# EAGLE board picaxe_dev (EAGLE 7.5.0)
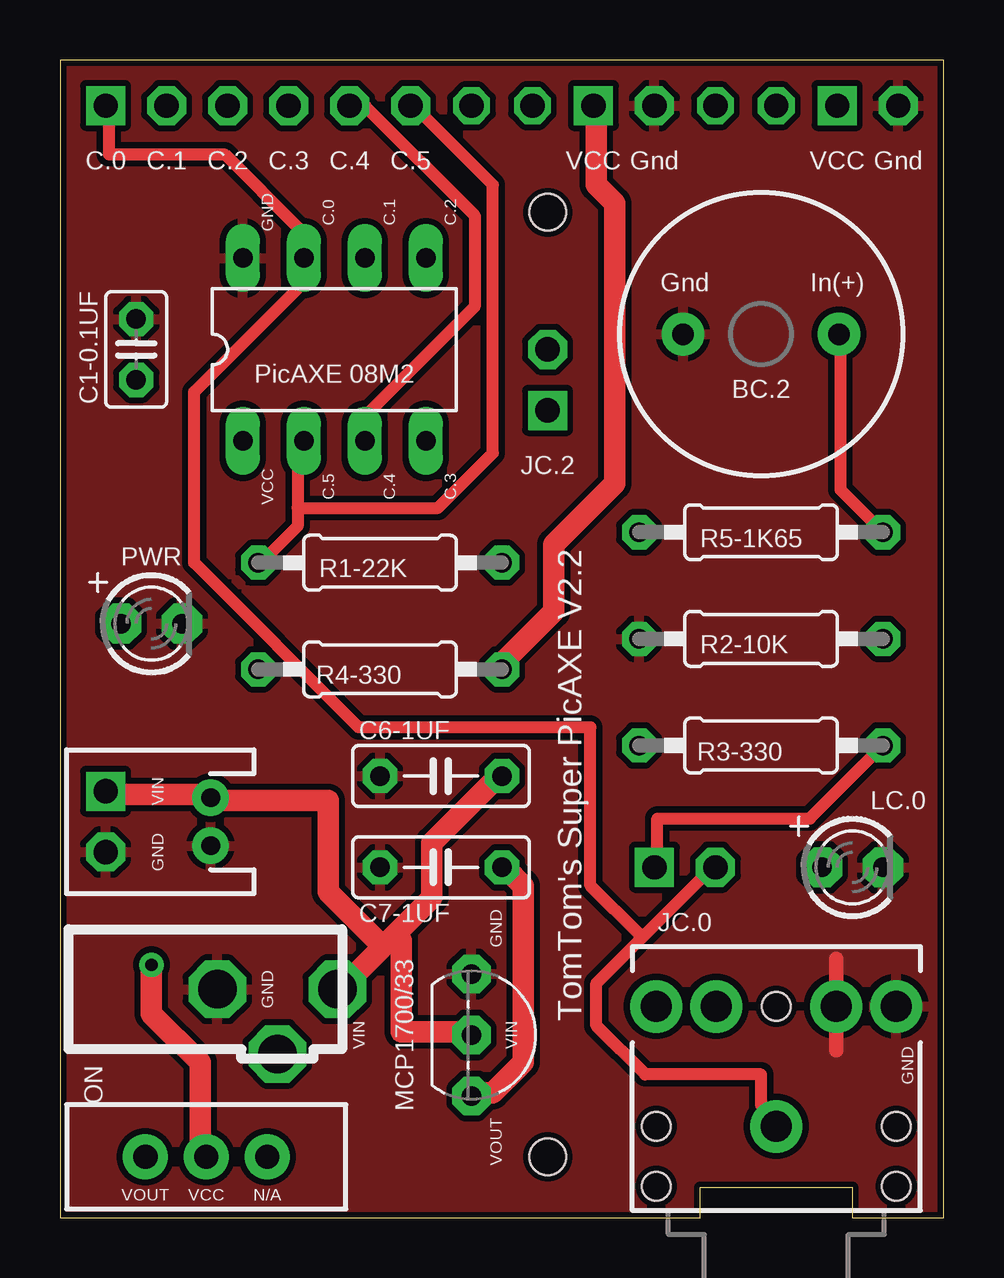
[diagram p0: board, top side]
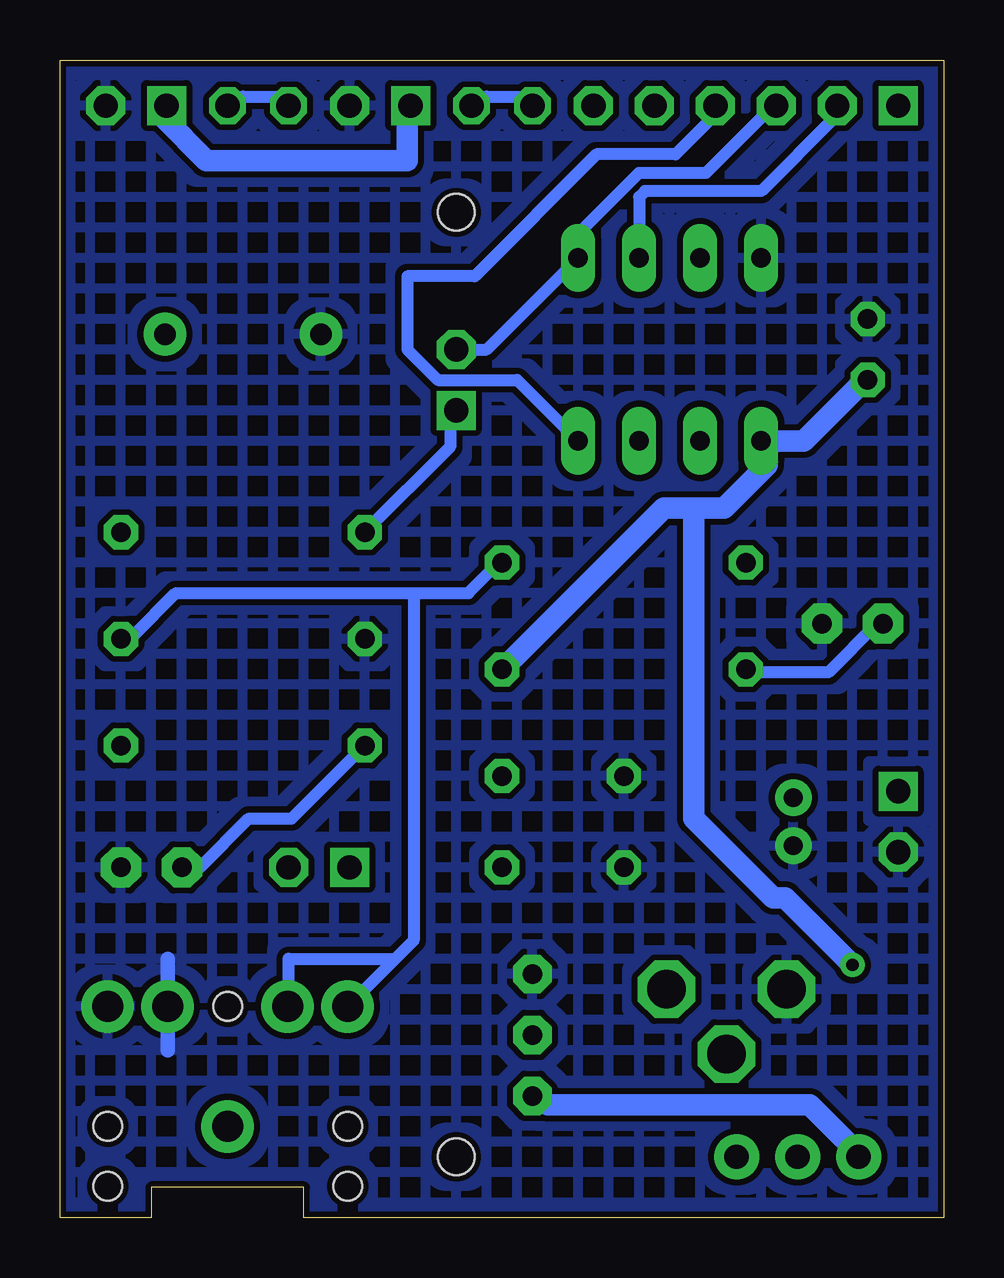
[diagram p1: board, bottom side, seen from below]

Size 36.83 x 48.26 mm. Coordinates in mm from the lower left corner, seen from the top.
Outline: 0,0 26.67,0 26.67,1.27 33.02,1.27 33.02,0 36.83,0 36.83,48.26 0,48.26 0,0
Copper layers (1*16): Top 0.035mm / dielectric 1.5mm / Bottom 0.035mm
Design rules "SparkFun *": minimum track width 20mil, minimum drill 20mil, track to track 8mil, track to pad 8mil, pad to pad 8mil, via to via 8mil, smd to smd 8mil, copper to edge 10mil, drill to drill 8mil, minimum pad ring 12mil, minimum via ring 10mil, stop-mask expansion 4mil, vias tented up to drill 25mil, thermal gap 10mil
Net classes: 0 default: width 0.508 mm; 1 GND: width 0.889 mm, drill 0.508 mm, clearance 0.254 mm; 2 VCC: width 0.889 mm, drill 0.508 mm, clearance 0.254 mm
Holes 1.52 mm at 20.32,41.91 20.32,2.54

## Footprints (pad centres in the part's own frame; a part is rotated, then mirrored left to right if it is on the bottom)
BUZZER-12MM = drill 0.9 pad 1.778: + 3.25,0; - -3.25,0
C025-025X050 = drill 0.813 octagon: 1 -1.27,0; 2 1.27,0
C050-025X075 = drill 0.813 octagon: 1 -2.54,0; 2 2.54,0
DIL8 = drill 0.813 long: 1 -3.81,-3.81; 2 -1.27,-3.81; 3 1.27,-3.81; 4 3.81,-3.81; 5 3.81,3.81; 6 1.27,3.81; 7 -1.27,3.81; 8 -3.81,3.81
3.5X1.3MM_DC_JACK = drill 1.6 octagon: 1 0,0; 2 -5,0; 3 -2.5,-2.7
1X06 = drill 1.016 square: 1 -6.35,0 | drill 1.016 octagon: 2 -3.81,0; 3 -1.27,0; 4 1.27,0; 5 3.81,0; 6 6.35,0
1X02 = drill 1.016 square: 1 -1.27,0 | drill 1.016 octagon: 2 1.27,0
JST-2-PTH = drill 0.787 pad 1.524: 1 -1,0; 2 1,0
LED3MM = drill 0.813 pad 1.676 octagon: A -1.27,0; K 1.27,0
TO92- = drill 0.813 pad 1.6 octagon: 1 2.54,0; 2 0,0; 3 -2.54,0
SWITCH-SPDT = drill 1.016 pad 1.88: 1 0,2.54; 2 0,0; 3 0,-2.54
0207/10 = drill 0.813 octagon: 1 -5.08,0; 2 5.08,0
AUDIO-JACK = drill 1.3 pad 2.184: RING 5,5; RSH 5,2.5; SLEEVE 0,0; TIP 5,-5; TSH 5,-2.5 | hole 1.2: 0,5; -2.5,5; -2.5,-5; 0,-5; 5,0

## Placement (x,y rotation side)
+  BUZZERPTH  [BUZZER-12MM]  29.21,36.83 180 top
C1-0.1UF  [C025-025X050]  3.18,36.2 90 top
C6-1UF  1uF  [C050-025X075]  15.87,18.41 180 top
C7-1UF  1uF  [C050-025X075]  15.87,14.61 180 top
IC1  PIC12F675P  [DIL8]  11.43,36.2 0 top
J7  3.5 X 1.3 mm  [3.5X1.3MM_DC_JACK]  11.56,9.53 0 top
JP1  [1X06]  8.25,46.35 0 top
JP2  [1X02]  33.66,46.35 0 top
JP3  [1X02]  23.5,46.35 0 top
JP4  [1X02]  26.04,14.61 0 top
JP5  [1X02]  20.32,34.92 90 top
JP6  [1X02]  1.9,16.51 270 top
JP7  LiPo Battery  [JST-2-PTH]  6.27,16.51 90 top
LED1  Green  [LED3MM]  33.02,14.61 0 top
LED2  Red  [LED3MM]  3.81,24.77 0 top
MCP  MCP  [TO92-]  17.14,7.62 270 top
ON  EXT  [SWITCH-SPDT]  6.1,2.54 270 top
R1-22K  [0207/10]  13.33,27.3 0 top
R2-10K  [0207/10]  29.21,24.13 0 top
R3-330  470R  [0207/10]  29.21,19.68 0 top
R4-330  470R  [0207/10]  13.33,22.86 0 top
R5-1K65  1K65  [0207/10]  29.21,28.58 0 top
U1  [AUDIO-JACK]  29.85,3.81 90 top

## Library data of the parts
+ JP7 ON = SparkFun
C1-0.1UF C6-1UF C7-1UF R1-22K R2-10K R3-330 R4-330 R5-1K65 = resistor
IC1 = microchip; MF: MICROCHIP; MPN: PIC12F675-E/P; OC_FARNELL: 9759018; OC_NEWARK: 92C4340
J7 = MY_CONN
JP1-JP6 = pinhead
LED1 LED2 = adafruit
MCP = MY_IC
U1 = SparkFun-Connectors

## Nets
C.0: IC1.7 JP1.1 JP4.2 U1.SLEEVE
C.1: IC1.6 JP1.2
C.2: IC1.5 JP1.3 JP5.2
C.3: IC1.4 JP1.4
C.4: IC1.3 JP1.5
C.5: IC1.2 JP1.6 R1-22K.1
FLOAT: ON.1
GND [GND]: +.+ C1-0.1UF.2 C6-1UF.2 C7-1UF.2 IC1.8 J7.2 JP2.2 JP3.2 JP6.2 JP7.1 LED1.K LED2.K MCP.3 R2-10K.1 U1.TIP
L-OUT: R1-22K.2 R2-10K.2 U1.RING
N$1: LED2.A R4-330.1
N$2: +.- R5-1K65.2
N$3: JP4.1 R3-330.2
N$4: LED1.A R3-330.1
N$6: JP5.1 R5-1K65.1
VCC [VCC]: C1-0.1UF.1 IC1.1 JP2.1 JP3.1 ON.2 R4-330.2
VCCEXT [VCC]: C6-1UF.1 J7.1 JP6.1 JP7.2 MCP.2
VCCREG [VCC]: C7-1UF.1 MCP.1 ON.3

## Tracks (layer width: path | path; a pad name or v marks a point on that pad's centre or on a via)
C.0
  Top 0.508: JP1.1 2.03,46.35 2.03,44.32 6.86,44.32 9.91,41.27 9.91,40.26 IC1.7 9.91,40.01 9.91,38.73 5.59,34.42 5.59,27.3 12.45,20.45 22.1,20.45 22.1,13.84 24.13,11.81 24.26,11.68 | 24.26,11.68 22.35,9.78 22.35,8 24.38,5.97 29.21,5.97 29.21,4.7 29.72,4.19 29.72,3.94 U1.SLEEVE | 24.26,11.68 27.18,14.61 JP4.2
C.1
  Bottom 0.508: IC1.6 12.7,42.55 12.45,42.8 7.62,42.8 4.57,45.85 4.57,46.35 JP1.2
C.2
  Bottom 0.508: JP5.2 19.05,36.2 IC1.5 15.24,41.02 12.7,43.56 9.91,43.56 7.11,46.35 JP1.3
C.3
  Bottom 0.508: IC1.4 17.78,34.92 21.08,34.92 22.35,36.2 22.35,39.24 19.56,39.24 14.48,44.32 11.18,44.32 9.65,45.85 9.65,46.35 JP1.4
C.4
  Top 0.508: IC1.3 12.95,32.64 12.95,33.66 17.27,37.97 17.27,41.78 12.7,46.35 12.19,46.35 JP1.5
C.5
  Top 0.508: 9.91,29.59 9.91,32.13 IC1.2 | 9.91,29.59 9.91,28.83 8.38,27.3 R1-22K.1 | 9.91,29.59 15.75,29.59 18.03,31.88 18.03,43.05 14.73,46.35 JP1.6
GND
  Top 0.61: 32.33,10.79 32.33,6.98
  Bottom 0.61: 32.33,10.79 32.33,6.98
  pour Top: -0.64,48.9 37.46,48.9 37.46,-0.64 -0.64,-0.64
  pour Bottom (hatched): -0.64,48.9 37.46,48.9 37.46,-0.64 -0.64,-0.64
L-OUT
  Bottom 0.508: 22.1,26.04 32,26.04 33.78,24.26 34.29,24.26 R2-10K.2 | 22.1,26.04 19.81,26.04 18.54,27.3 R1-22K.2 | 22.86,10.79 22.1,11.56 22.1,26.04 | 22.86,10.79 24.64,9.02 U1.RING | 27.3,8.89 27.3,10.79 22.86,10.79
N$1
  Bottom 0.508: LED2.A 2.79,24.77 4.83,22.73 8.13,22.73 R4-330.1
N$2
  Top 0.508: R5-1K65.2 32.51,30.35 32.51,36.7 +.-
N$3
  Top 0.508: R3-330.2 31.24,16.64 24.89,16.64 24.89,14.61 JP4.1
N$4
  Bottom 0.508: R3-330.1 27.18,16.64 28.96,16.64 30.99,14.61 LED1.A
N$6
  Bottom 0.508: R5-1K65.1 20.57,32.13 20.57,33.66 JP5.1
SPARE0  (via drill 1.02)
  Bottom 0.508: v17.14,46.35 17.27,46.48 17.53,46.74 19.05,46.74 19.3,46.48 19.56,46.48 v19.69,46.35
SPARE1  (via drill 1.02)
  Bottom 0.508: v27.3,46.35 27.43,46.48 27.69,46.74 29.21,46.74 29.46,46.48 29.72,46.48 v29.85,46.35
VCC  (via drill 0.51)
  Top 0.889: v3.81,10.54 3.81,8.51 5.84,6.48 5.84,2.92 6.1,2.67 ON.2 | JP3.1 22.35,46.35 22.35,43.05 23.11,42.29 23.11,30.61 20.57,28.07 20.57,25.27 18.54,23.24 18.54,22.99 R4-330.2
  Bottom 0.889: JP3.1 22.35,46.35 22.35,44.07 30.73,44.07 32.51,45.85 32.51,46.35 JP2.1 | C1-0.1UF.1 3.3,34.92 5.84,32.38 IC1.1 7.37,32.13 7.37,31.37 9.14,29.59 10.41,29.59 | 10.41,29.59 11.68,29.59 18.29,22.99 R4-330.2 | v3.81,10.54 6.6,13.34 7.11,13.34 10.41,16.64 10.41,29.34 10.41,29.59
VCCEXT
  Top 0.889: JP6.1 2.03,17.65 6.1,17.65 JP7.2 6.6,17.4 11.18,17.4 11.18,13.59 13.21,11.56 13.46,11.3 | 13.46,11.3 11.68,9.53 J7.1 | 13.46,11.3 13.97,11.81 | 13.97,11.81 15.49,13.34 15.49,15.62 18.29,18.41 C6-1UF.1 | MCP.2 17.02,7.75 14.22,7.75 14.22,11.56 13.97,11.81
VCCREG
  Top 0.889: C7-1UF.1 18.54,14.61 19.3,13.84 19.3,6.48 18.03,5.21 17.27,5.21 MCP.1
  Bottom 0.889: ON.3 3.56,2.67 5.59,4.7 16.51,4.7 16.76,4.95 17.02,4.95 MCP.1

## Text on the board
tNames: C.0 | C.1 | C.2 | C.3 | C.4 | C.5 | VCC | Gnd | VCC | Gnd | GND | C.0 | C.1 | C.2 | Gnd | In(+) | PicAXE 08M2 | BC.2 | JC.2 | VCC | C.5 | C.4 | C.3 | PWR | VIN | TomTom's Super PicAXE V2.2 | LC.0 | GND | GND | JC.0 | GND | VIN | MCP1700/33 | VIN | GND | VOUT | VOUT | VCC | N/A